# Altium PCB Bewaesserung_Rev_B.PcbDoc
Units mm, origin at the board's own origin, x right, y up, seen from the top; angles counter-clockwise.
Board outline 238.7 x 148.7 mm, 2 copper layers (Top Layer, Bottom Layer); 91 components, 70 nets, 343 pads, 4 vias.
Unrouted connection lines stored in the file: 194.
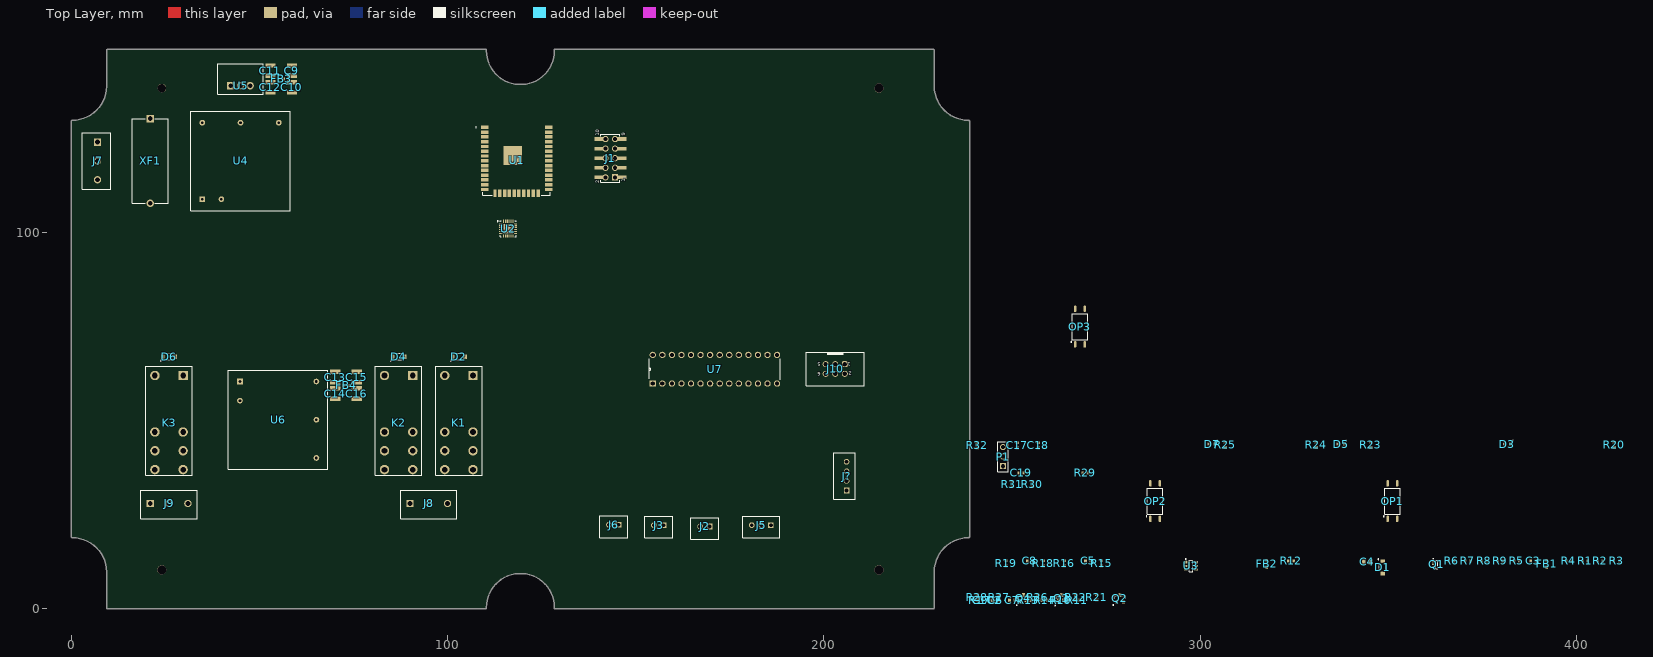
[diagram p0: Top Layer view]
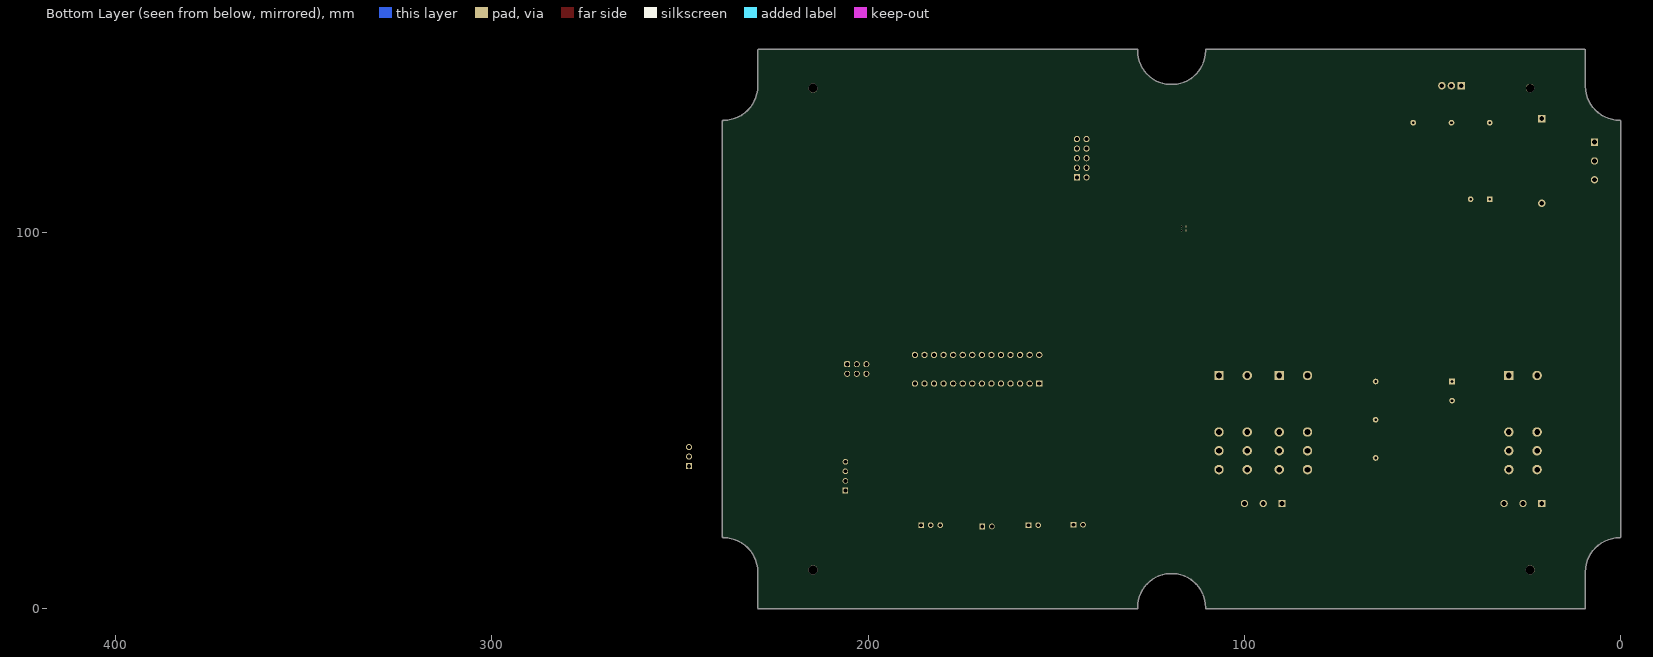
[diagram p1: Bottom Layer view, seen from below]

## Layer stack, top to bottom
Top Solder: solder mask 0.0102, Solder Resist, Dk 3.5
Top Layer: signal copper 0.0356
Dielectric 1: dielectric 0.32, FR-4, Dk 4.8
Bottom Layer: signal copper 0.0356
Bottom Solder: solder mask 0.0102, Solder Resist, Dk 3.5

## Board outline
0.35,18.9 1.363,18.843 2.364,18.673 3.339,18.392 4.277,18.004 5.165,17.513 5.993,16.926 6.749,16.249 7.426,15.493 8.013,14.665 8.504,13.777 8.892,12.839 9.173,11.864 9.343,10.863 9.4,9.85 9.4,0.35 9.409,0.272 9.435,0.198 9.476,0.132 9.532,0.076 9.598,0.035 9.672,0.009 9.75,0 110.3,0 110.3,0.35 110.353,1.328 110.512,2.295 110.774,3.24 111.136,4.15 111.595,5.016 112.145,5.827 112.78,6.574 113.491,7.248 114.271,7.841 115.111,8.346 116,8.757 116.929,9.07 117.886,9.281 118.86,9.387 119.84,9.387 120.814,9.281 121.771,9.07 122.7,8.757 123.589,8.346 124.429,7.841 125.209,7.248 125.92,6.574 126.555,5.827 127.105,5.016 127.564,4.15 127.926,3.24 128.188,2.295 128.347,1.328 128.4,0.35 128.4,0 228.95,0 229.028,0.009 229.102,0.035 229.168,0.076 229.224,0.132 229.265,0.198 229.291,0.272 229.3,0.35 229.3,9.85 229.357,10.863 229.527,11.864 229.808,12.839 230.196,13.777 230.687,14.665 231.274,15.493 231.951,16.249 232.707,16.926 233.535,17.513 234.423,18.004 235.361,18.392 236.336,18.673 237.337,18.843 238.35,18.9 238.428,18.909 238.502,18.935 238.568,18.976 238.624,19.032 238.665,19.098 238.691,19.172 238.7,19.25 238.7,129.45 238.691,129.528 238.665,129.602 238.624,129.668 238.568,129.724 238.502,129.765 238.428,129.791 238.35,129.8 237.337,129.857 236.336,130.027 235.361,130.308 234.423,130.696 233.535,131.187 232.707,131.774 231.951,132.451 231.274,133.207 230.687,134.035 230.196,134.923 229.808,135.861 229.527,136.836 229.357,137.837 229.3,138.85 229.3,148.35 229.291,148.428 229.265,148.502 229.224,148.568 229.168,148.624 229.102,148.665 229.028,148.691 228.95,148.7 128.4,148.7 128.4,148.35 128.347,147.372 128.188,146.405 127.926,145.46 127.564,144.55 127.105,143.684 126.555,142.873 125.92,142.126 125.209,141.452 124.429,140.859 123.589,140.354 122.7,139.943 121.771,139.63 120.814,139.419 119.84,139.313 118.86,139.313 117.886,139.419 116.929,139.63 116,139.943 115.111,140.354 114.271,140.859 113.491,141.452 112.78,142.126 112.145,142.873 111.595,143.684 111.136,144.55 110.774,145.46 110.512,146.405 110.353,147.372 110.3,148.35 110.3,148.7 9.75,148.7 9.672,148.691 9.598,148.665 9.532,148.624 9.476,148.568 9.435,148.502 9.409,148.428 9.4,148.35 9.4,138.85 9.343,137.837 9.173,136.836 8.892,135.861 8.504,134.923 8.013,134.035 7.426,133.207 6.749,132.451 5.993,131.774 5.165,131.187 4.277,130.696 3.339,130.308 2.364,130.027 1.363,129.857 0.35,129.8 0.272,129.791 0.198,129.765 0.132,129.724 0.076,129.668 0.035,129.602 0.009,129.528 0,129.45 0,19.25 0.009,19.172 0.035,19.098 0.076,19.032 0.132,18.976 0.198,18.935 0.272,18.909

## Design rules (kind name [scope] priority, off if disabled: settings)
Clearance [All] p1: gap=0.254 ignorepadtopadclearanceinfootprint=FALSE except(0: Arc-Hole Track-Hole SMDPad-Hole THPad-Hole Via-Hole Fill-Hole Poly-Hole Region-Hole Text-Hole)
DiffPairsRouting [All] p1: maxlimit=0.254 minlimit=0.254 mostfreqgap=0.254 toplayer_minwidth=0.381 toplayer_maxwidth=0.381 toplayer_prefwidth=0.381 bottomlayer_minwidth=0.381 bottomlayer_maxwidth=0.381 bottomlayer_prefwidth=0.381 maxuncoupledlength=12.7
PolygonConnect [All] p1: connectstyle=Relief reliefconductorwidth=0.254 reliefentries=4 polygonreliefangle="90 Angle" airgapwidth=0.254
RoutingVias [All] p1: holewidth=0.711 width=1.27 viastyle="Through Hole" minholewidth=0.711 minwidth=1.27 maxholewidth=0.711 maxwidth=1.27
SolderMaskExpansion [All] p1: expansion=0.102 istentingtop=FALSE
Width [All] p1: maxlimit=0.254 minlimit=0.254 preferedwidth=0.254
29 further rules are at their usual default settings.

## Classes and differential pairs
net class PWR: +12V0D GND NetU4_5 PGND VCC
net class HV: L L_F N PE PUMPE_L PUMPE_N VALVE_CLOSE VALVE_L VALVE_N VALVE_OPEN
component class 03_Flow: C17 C18 C19 J10 P1 R32 U7
differential pair class USB_D: USB_D USB_D_ESD
component class 02_Power: C9 C10 C11 C12 C13 C14 C15 C16 D2 D3 D4 D5 D6 D7 FB3 FB4 J7 J8 J9 K1 K2 K3 OP1 OP2 OP3 Q2 Q3 Q4 R20 R21 R22 R23 R24 R25 R26 R27 R28 R29 R30 R31 U4 U5 U6 XF1
component class 01_MCU: C1 C2 C3 C4 C5 C6 C7 C8 D1 FB1 FB2 J1 J2 J3 J5 J6 J? Q1 R1 R2 R3 R4 R5 R6 R7 R8 R9 R10 R11 R12 R13 R14 R15 R16 R17 R18 R19 U1 U2 U3
differential pair USB_D: +USB_D_P -USB_D_N
differential pair USB_D_ESD: +USB_D_ESD_P -USB_D_ESD_N

## Components (designator, comment, footprint, x,y, rotation, side; value= is the part's Value field where it differs from the comment)
C1 "CL10B103KA8NNNC" C_0603_B 241.337,2.325 r0 top value=10nF
C2 "CL10B104KA8NNNC" C_0603_B 245.312,2.325 r0 top value=100nF
C3 "CL10B104KA8NNNC" C_0603_B 388.469,12.726 r0 top value=100nF
C4 "CL21A226MQQNNNE" C_0805_B 344.267,12.501 r0 top value=22uF
C5 "CL10B105KO8NNNC" C_0603_B 270.188,12.726 r0 top value=1uF
C6 "CL10B104KA8NNNC" C_0603_B 245.662,2.325 r0 top value=100nF
C7 "CL10B104KA8NNNC" C_0603_B 249.987,2.325 r0 top value=100nF
C8 "CL10B104JA8NNNC" C_0603_B 254.713,12.726 r0 top value=100nF
C9 "CL32B226KAJNNNE" C_1210_B 58.65,142.975 r270 top value=22uF
C10 "CL32B106KAJNNNE" C_1210_B 58.65,138.575 r90 top value=10uF
C11 "CL32B226KAJNNNE" C_1210_B 52.95,142.975 r270 top value=22uF
C12 "CL32B106KAJNNNE" C_1210_B 52.95,138.575 r90 top value=10uF
C13 "CL32B226KAJNNNE" C_1210_B 70.175,61.6 r270 top value=22uF
C14 "CL32B106KAJNNNE" C_1210_B 70.175,57.2 r90 top value=10uF
C15 "CL32B226KAJNNNE" C_1210_B 75.875,61.6 r270 top value=22uF
C16 "CL32B106KAJNNNE" C_1210_B 75.875,57.2 r90 top value=10uF
C17 "CL10B103KA8NNNC" C_0603_B 251.337,43.452 r90 top value=10nF
C18 "CL10B104KA8NNNC" C_0603_B 256.913,43.452 r90 top value=100nF
C19 "CL10B104KA8NNNC" C_0603_B 252.412,36.102 r0 top value=100nF
D1 "SS1040_R1_00001" SS1040_R1_00001 348.392,11.051 r90 top
D2 "SS1040_R1_00001" SS1040_R1_00001 103,67 r180 top
D3 "SML-D12P8WT86" "0603 LED" 381.569,43.802 r0 top
D4 "SS1040_R1_00001" SS1040_R1_00001 87,67 r180 top
D5 "SML-D12P8WT86" "0603 LED" 337.392,43.802 r0 top
D6 "SS1040_R1_00001" SS1040_R1_00001 26,67 r180 top
D7 "SML-D12P8WT86" "0603 LED" 303.09,43.802 r0 top
FB1 "742792641" "WE-CBF_0603_High Current" 391.969,11.926 r90 top
FB2 "742792641" "WE-CBF_0603_High Current" 317.616,11.926 r90 top
FB3 "MPZ1608S601ATD25" MPZ1608S601ATD25 55.8,140.775 r0 top
FB4 "MPZ1608S601ATD25" MPZ1608S601ATD25 73.025,59.4 r0 top
J1 "61001621121" 61001621121 143.235,119.725 r90 top
J2 "B2B-XH-A" JST_XH_2.54_2pin_vert 168.355,21.9 r180 top
J3 "B2B-XH-A" JST_XH_2.54_2pin_vert 156.075,22.25 r180 top
J5 "B3B-XH-A" JST_XH_2.54_3pin_vert 183.35,22.25 r180 top
J6 "B2B-XH-A" JST_XH_2.54_2pin_vert 144.145,22.35 r180 top
J7 "691137710003" 691137710003 7,119 r270 top
J8 "691137710003" 691137710003 95,28 r0 top
J9 "691137710003" 691137710003 26,28 r0 top
J10 "61200621621" 61200621621 202.985,63.73 r180 top
J? "B4B-XH-A" JST_XH_2.54_4pin_vert 206,35.27 r90 top
K1 "40.52.9.012.0000" 40.52.9.012.0000 103,50 r270 top
K2 "40.52.9.012.0000" 40.52.9.012.0000 87,50 r270 top
K3 "40.52.9.012.0000" 40.52.9.012.0000 26,50 r270 top
OP1 "TCLD1000" TCLD1000 351.017,28.627 r90 top
OP2 "TCLD1000" TCLD1000 287.964,28.627 r90 top
OP3 "TCLD1000" TCLD1000 268,75 r90 top
P1 "61300311121" 61300311121 247.562,40.452 r90 top
Q1 "MBT3904DW1T1G" ONSC-SOT-363-6-419B-02_W_V 362.768,11.826 r0 top
Q2 "IRLML6244TRPBF" IRLML6244TRPBF 278.639,2.8 r0 top
Q3 "IRLML6244TRPBF" IRLML6244TRPBF 263.163,2.8 r0 top
Q4 "IRLML6244TRPBF" IRLML6244TRPBF 252.987,2.8 r0 top
R1 "RC0603FR-0710KL" R_0603_B 402.245,12.726 r0 top value=10K
R2 "RC0603FR-0710KL" R_0603_B 406.22,12.726 r0 top value=10K
R3 "RC0603FR-0710KL" R_0603_B 410.545,12.726 r0 top value=10K
R4 "RC0603FR-0710KL" R_0603_B 397.92,12.726 r0 top value=10K
R5 "RC0603FR-0710KL" R_0603_B 383.994,12.726 r0 top value=10K
R6 "RC0603FR-072K2L" R_0603_B 366.718,12.726 r0 top value=2K2
R7 "RC0603FR-0710KL" R_0603_B 371.043,12.726 r0 top value=10K
R8 "RC0603FR-072K2L" R_0603_B 375.368,12.726 r0 top value=2K2
R9 "RC0603FR-0710KL" R_0603_B 379.669,12.726 r0 top value=10K
R10 "RC0603FR-071KL" R_0603_B 262.938,2.325 r0 top value=1K
R11 "RC0603FR-071KL" R_0603_B 267.238,2.325 r0 top value=1K
R12 "RC0603FR-0710KL" R_0603_B 324.091,12.726 r0 top value=10K
R13 "RC0603FR-071KL" R_0603_B 254.288,2.325 r0 top value=1K
R14 "RC0603FR-0710KL" R_0603_B 258.613,2.325 r0 top value=10K
R15 "RC0603FR-0722KL" R_0603_B 273.738,12.101 r90 top value=22K
R16 "RC0603FR-0722KL" R_0603_B 263.838,12.101 r90 top value=22K
R17 "RC0603FR-0718KL" R_0603_B 241.337,2.325 r0 top value=18K
R18 "RC0603FR-0747KL" R_0603_B 258.263,12.101 r90 top value=47K
R19 "RC0603FR-0747KL" R_0603_B 248.362,12.101 r90 top value=47K
R20 "RC0603FR-074K7L" R_0603_B 409.97,43.577 r90 top value=4K7
R21 "RC0603FR-072K26L" R_0603_B 272.488,3.075 r90 top value=2K26
R22 "RC0603FR-0710KL" R_0603_B 266.888,3.075 r90 top value=10K
R23 "RC0603FR-07360RL" R_0603_B 345.242,43.577 r90 top value=360R
R24 "RC0603FR-074K7L" R_0603_B 330.741,43.577 r90 top value=4K7
R25 "RC0603FR-072K26L" R_0603_B 306.64,43.577 r90 top value=2K26
R26 "RC0603FR-0710KL" R_0603_B 256.738,3.075 r90 top value=10K
R27 "RC0603FR-07360RL" R_0603_B 246.562,3.075 r90 top value=360R
R28 "RC0603FR-074K7L" R_0603_B 240.737,3.075 r90 top value=4K7
R29 "RC0603FR-072K26L" R_0603_B 269.438,36.102 r0 top value=2K26
R30 "RC0603FR-0710KL" R_0603_B 255.288,33.177 r90 top value=10K
R31 "RC0603FR-07360RL" R_0603_B 249.962,33.177 r90 top value=360R
R32 "RC0603FR-071KL" R_0603_B 240.737,43.452 r90 top value=1K
U1 "ESP32-WROOM-32D-N16" MODULE_ESP32-WROOM-32D 118.325,120.425 r0 top
U2 "CP2102N-A02-GQFN24R" SLAB-QFN-24-2550x2550TP_A_V 116.1,101.025 r0 top
U3 "82400102" SOT95P280X145-6N 297.49,11.426 r0 top
U4 "TMPS 03-112" "TMPS 03" 45,119 r180 top
U5 "TSR 0.5-2433" "TSR 0.5-2433-Footprint-1" 45,139 r180 top
U6 "TMPS 03-112" "TMPS 03" 55,50.25 r90 top
U7 "ATMEGA8A-PU" DIP254P762X457-28 171.025,63.665 r90 top
XF1 "696103201002" 696103201002 21,119 r270 top

## Footprints (in the part's own frame and the unit in brackets; to place one, negate y for a bottom-side part, rotate by r counter-clockwise, add the part's x,y. Pads: shape width x height; smd on the part's side, far side on the other; paste and mask are expansions set on the pad)
40.52.9.012.0000 [mm] "40.52.9.012.0000 relay"
  round 2.5 hole 1.5: 11(8,3.75) 12(3,3.75) 14(13,3.75) 21(8,-3.75) 22(3,-3.75) 24(13,-3.75) A2(-12,-3.75)
  rect 2.5x2.5 hole 1.5: A1(-12,3.75)
  silkscreen extent -14.5,-6.2 14.5,6.2, body extent -15.01,-6.22 13.99,6.18, height 25
"0603 LED" [mm] "0603 LED"
  rect 0.8x0.8 smd: A(-0.825,0) K(0.825,0)
  silkscreen extent 1.28,0.78 1.53,1.02, body extent -0.8,-0.4 0.8,0.4, height 0.55
61001621121 [mm] "Pin Header, pitch 2.54 mm, SMD, Vertical, dual row, 16p"
  rect 1x3.1 smd: 1(-5.08,-2.7) 2(-5.08,2.7) 3(-2.54,-2.7) 4(-2.54,2.7) 5(0,-2.7) 6(0,2.7) 7(2.54,-2.7) 8(2.54,2.7) 9(5.08,-2.7) 10(5.08,2.7)
  rect 1.65x1.65 hole 1.1: 1(-5.08,-1.265)
  round 1.65 hole 1.1: 2(-5.08,1.275) 3(-2.54,-1.265) 4(-2.54,1.275) 5(0,-1.265) 6(0,1.275) 7(2.54,-1.265) 8(2.54,1.275) 9(5.08,-1.265) 10(5.08,1.275)
  silkscreen extent -6.43,-2.56 6.43,2.57, body extent -6.35,-3.75 6.35,3.75, height 9.57
61200621621 [mm] "6 pins, straight, gold plating"
  rrect50% 1.6x1.6 hole 1.1: 1(-2.54,-1.27)
  round 1.6 hole 1.1: 2(-2.54,1.27) 3(0,-1.27) 4(0,1.27) 5(2.54,-1.27) 6(2.54,1.27)
  silkscreen extent -7.74,-4.5 7.74,4.5, body extent -7.64,-4.43 7.64,4.75, height 9.13
61300311121 [mm] "Pin Header, pitch 2.54 mm, THT, Vertical, single row, 3p"
  rect 1.6x1.6 hole 1.1: 1(-2.54,0)
  round 1.6 hole 1.1: 2(0,0) 3(2.54,0)
  silkscreen extent -3.96,-1.35 3.96,1.35, body extent -3.81,-1.27 3.81,1.27, height 8.57
691137710003 [mm] "Horizontal Cable Entry with Pressure Clamp, pitch 5mm, 03p"
  rect 1.95x1.95 hole 1.3: 1(-5,0)
  round 1.95 hole 1.3: 2(0,0) 3(5,0)
  silkscreen extent -7.5,-4 7.5,3.5, body extent -7.5,-4 7.5,3.5, height 11.6
696103201002 [mm] "FUSEHOLDER BLOCKS - PCB - CLIP COVER - THR"
  rect 1.95x1.95 hole 1.3: 1(-11.25,0)
  round 1.95 hole 1.3: 2(11.25,0)
  silkscreen extent -11.2,-4.8 11.2,4.8, body extent -12.05,-4.8 12.05,4.8, height 11.55
C_0603_B [mm]
  rect 0.7x0.9 smd: 1(-0.7,0) 2(0.7,0)
  body extent -0.8,-0.4 0.8,0.4, height 0.9
C_0805_B [mm]
  rect 1x1.35 smd: 1(-0.9,0) 2(0.9,0)
  body extent -1,-0.62 1,0.63, height 1.45
C_1210_B [mm]
  rect 1.15x2.7 smd: 1(-1.375,0) 2(1.375,0)
  body extent -1.6,-1.25 1.6,1.25, height 2.8
DIP254P762X457-28 [mil]
  rect 66x66 hole 44: 1(-150,650)
  round 66 hole 44: 2(-150,550) 3(-150,450) 4(-150,350) 5(-150,250) 6(-150,150) 7(-150,50) 8(-150,-50) 9(-150,-150) 10(-150,-250) 11(-150,-350) 12(-150,-450) 13(-150,-550) 14(-150,-650) 15(150,-650) 16(150,-550) 17(150,-450) 18(150,-350) 19(150,-250) 20(150,-150) 21(150,-50) 22(150,50) 23(150,150) 24(150,250) 25(150,350) 26(150,450) 27(150,550) 28(150,650)
  silkscreen extent -112,-685 112,685, body extent -200,-684 200,681, height 180
IRLML6244TRPBF [mm] "N-MOSFET Vds 20V Uth 1.0V RDSon 27mO"
  rect 0.802x0.972 smd: 1(-0.95,-0.885) 2(0.95,-0.885) 3(0,0.885)
  silkscreen extent -1.9,-1.9 1.52,0.7, body extent -1.52,-1.32 1.52,1.32, height 1.12
JST_XH_2.54_2pin_vert [mm] "JST XH-A-series straight THT 2-pol."
  rect 1.5x1.5 hole 1: 1(-1.27,0)
  round 1.5 hole 1: 2(1.27,0)
  silkscreen extent -3.7,-2.35 3.7,3.4, body extent -3.61,-2.49 3.61,3.35, height 7.21
JST_XH_2.54_3pin_vert [mm] "JST XH-A-series straight THT 3-pol."
  rect 1.5x1.5 hole 1: 1(-2.54,0)
  round 1.5 hole 1: 2(0,0) 3(2.54,0)
  silkscreen extent -4.95,-2.35 4.95,3.4, body extent -4.88,-2.49 4.88,3.35, height 7.21
JST_XH_2.54_4pin_vert [mm] "JST connector, XH-series, vertival, 4pos."
  rect 1.5x1.5 hole 1: 1(-3.81,0)
  round 1.5 hole 1: 2(-1.27,0) 3(1.27,0) 4(3.81,0)
  silkscreen extent -6.2,-2.35 6.2,3.4, body extent -6.15,-2.49 6.15,3.35, height 7.21
MODULE_ESP32-WROOM-32D [mm]
  rect 2x0.9 smd: 1(-8.5,7.5) 2(-8.5,6.23) 3(-8.5,4.96) 4(-8.5,3.69) 5(-8.5,2.42) 6(-8.5,1.15) 7(-8.5,-0.12) 8(-8.5,-1.39) 9(-8.5,-2.66) 10(-8.5,-3.93) 11(-8.5,-5.2) 12(-8.5,-6.47) 13(-8.5,-7.74) 14(-8.5,-9.01) 25(8.5,-9.01) 26(8.5,-7.74) 27(8.5,-6.47) 28(8.5,-5.2) 29(8.5,-3.93) 30(8.5,-2.66) 31(8.5,-1.39) 32(8.5,-0.12) 33(8.5,1.15) 34(8.5,2.42) 35(8.5,3.69) 36(8.5,4.96) 37(8.5,6.23) 38(8.5,7.5)
  rect 0.9x2 smd: 15(-5.715,-10.01) 16(-4.445,-10.01) 17(-3.175,-10.01) 18(-1.905,-10.01) 19(-0.635,-10.01) 20(0.635,-10.01) 21(1.905,-10.01) 22(3.175,-10.01) 23(4.445,-10.01) 24(5.715,-10.01)
  rect 5x5 smd: 39(-1,0)
  silkscreen extent -10.9,-10.51 9,7.6, body extent -9,-10.51 9,14.99, height 3.26
MPZ1608S601ATD25 [mm] "SMD Ferrit Bead 600O@100MHz 1A DCR 150mO"
  rect 0.6x0.8 smd: 1(-0.7,0) 2(0.7,0)
  body extent -0.87,-0.48 0.87,0.48, height 0.95
ONSC-SOT-363-6-419B-02_W_V [mm]
  rect 0.5x0.4 smd: 1(-0.95,0.65) 2(-0.95,0) 3(-0.95,-0.65) 4(0.95,-0.65) 5(0.95,0) 6(0.95,0.65)
  silkscreen extent -1.07,-1.1 0.3,1.52, body extent -0.63,-1 0.63,1, height 1.1
R_0603_B [mm]
  rect 0.7x0.9 smd: 1(-0.7,0) 2(0.7,0)
  body extent -0.85,-0.45 0.85,0.45, height 0.55
SLAB-QFN-24-2550x2550TP_A_V [mm]
  rect 0.85x0.3 smd: 1(-1.95,1.25) 2(-1.95,0.75) 3(-1.95,0.25) 4(-1.95,-0.25) 5(-1.95,-0.75) 6(-1.95,-1.25) 13(1.95,-1.25) 14(1.95,-0.75) 15(1.95,-0.25) 16(1.95,0.25) 17(1.95,0.75) 18(1.95,1.25)
  rect 0.3x0.85 smd: 7(-1.25,-1.95) 8(-0.75,-1.95) 9(-0.25,-1.95) 10(0.25,-1.95) 11(0.75,-1.95) 12(1.25,-1.95) 19(1.25,1.95) 20(0.75,1.95) 21(0.25,1.95) 22(-0.25,1.95) 23(-0.75,1.95) 24(-1.25,1.95)
  rect 2.55x2.55 smd paste-0.3: 25(0,0)
  silkscreen extent -2.92,-2.15 2.15,2.15, body extent -2,-2 2,2, height 0.8
SOT95P280X145-6N [mm]
  rect 1x0.6 smd: 1(-1.375,0.95) 2(-1.375,0) 3(-1.375,-0.95) 4(1.375,-0.95) 5(1.375,0) 6(1.375,0.95)
  silkscreen extent -1.5,-1.55 0.5,1.92, body extent -1.6,-1.53 1.6,1.53, height 1.45
SS1040_R1_00001 [mm] "SOD-123"
  rect 0.97x1.22 smd: A(-1.64,0) K(1.64,0)
  silkscreen extent -0.8,-0.85 2.27,1.22, body extent -1.9,-0.85 1.95,0.85, height 1.45
TCLD1000 [mm] "SOP, 4-Leads, Body 3,95x7,50mm, Pitch 2,54mm, IPC Medium Density"
  oval 1.75x0.65 smd: 1(-4.725,1.27) 2(-4.725,-1.27) 3(4.725,-1.27) 4(4.725,1.27)
  silkscreen extent -4.19,-2.05 3.45,2.41, body extent -5.1,-2.05 5.1,2.05, height 2.3
"TMPS 03" [mm]
  rect 1.5x1.5 hole 0.7: 1(10.16,10.16)
  round 1.5 hole 0.7: 2(5.08,10.16) 3(-10.16,-10.16) 4(0,-10.16) 5(10.16,-10.16)
  silkscreen extent -13.2,-13.2 13.2,13.2, body extent -12.85,-12.85 12.85,12.85, height 16.6
"TSR 0.5-2433-Footprint-1" [mm]
  rect 2x2 hole 1.2: 1(2.54,0)
  round 2 hole 1.2: 2(0,0) 3(-2.54,0)
  silkscreen extent -6,-5.8 6,2.25, body extent -5.71,-5.43 5.79,2.12, height 10.22
"WE-CBF_0603_High Current" [mm] "SMD EMI Suppression Ferrite  Bead, body 1.6x0.8mm"
  rect 0.95x0.7 smd: 1(-0.825,0) 2(0.825,0)
  body extent -0.8,-0.4 0.8,0.4, height 0.8

## Part data
C1 C17: library part CMP-001-00194-31, "CAP 10nF 25V 0603 ±10% X7R", Dielectric=X7R, Manufacturer=Samsung, Maximum Operating Temperature=125, Minimum Operating Temperature=-55, Package=0603, Tolerance=±10%, Voltage=25V, Creator="MSt 10-08-21", Distributor=Digikey, Distributor Ordering Code=1276-1132-1-ND, Manufacturer Part Number=CL10B103KA8NNNC, Mounting Type=SMT, Packaging="Cut Tape", Pad Count=2, RoHS=Yes
C2 C3 C6 C7 C18 C19: library part CMP-001-00198-28, "CAP 100nF 25V 0603 ±10% X7R", Dielectric=X7R, Manufacturer=Samsung, Maximum Operating Temperature=125, Minimum Operating Temperature=-55, Package=0603, Tolerance=±10%, Voltage=25V, Creator="Mst 10-08-21", Distributor=Digikey, Distributor Ordering Code=1276-1006-1-ND, Manufacturer Part Number=CL10B104KA8NNNC, Mounting Type=SMD, Packaging="cut tape", Pad Count=2, Placed=Yes, Revision Status=new, RoHS=yes
C4: library part CMP-001-00489-27, "CAP 22uF 6.3V 0805 ±20% X5R", Dielectric=X5R, Manufacturer=Samsung, Maximum Operating Temperature=85, Minimum Operating Temperature=-55, Package=0805, Tolerance=±20%, Voltage=6.3V, Creator="Mst 10-08-21", Distributor=Digikey, Distributor Ordering Code=1276-1100-1-ND, Manufacturer Part Number=CL21A226MQQNNNE, Mounting Type=SMD, Packaging="cut tape", Pad Count=2, Placed=Yes, Revision Status=new, RoHS=yes
C5: library part CMP-001-00192-28, "CAP 1uF 16V 0603 ±10% X7R", Dielectric=X7R, Manufacturer=Samsung, Maximum Operating Temperature=125, Minimum Operating Temperature=-55, Package=0603, Tolerance=±10%, Voltage=16V, Creator="Mst 10-08-21", Distributor=Digikey, Distributor Ordering Code=1276-1019-1-ND, Manufacturer Part Number=CL10B105KO8NNNC, Mounting Type=SMD, Packaging="cut tape", Pad Count=2, Placed=Yes, Revision Status=new, RoHS=yes
C8: library part CMP-001-00197-28, "CAP 100nF 25V 0603 ±5% X7R", Dielectric=X7R, Manufacturer=Samsung, Maximum Operating Temperature=125, Minimum Operating Temperature=-55, Package=0603, Tolerance=±5%, Voltage=25V, Creator="Mst 10-08-21", Distributor=Digikey, Distributor Ordering Code=1276-1929-1-ND, Manufacturer Part Number=CL10B104JA8NNNC, Mounting Type=SMD, Packaging="cut tape", Pad Count=2, Placed=Yes, Revision Status=new, RoHS=yes
C9 C11 C13 C15: library part CMP-002-001930-51, "CAP 22uF 25V 1210 ±10% X7R", Dielectric=X7R, Manufacturer=Samsung, Maximum Operating Temperature=125, Minimum Operating Temperature=-55, Package=1210, Tolerance=±10%, Voltage=25V, Creator="MSt 31-08-21", Distributor=Digikey, Distributor Ordering Code=1276-3392-1-ND, Manufacturer Part Number=CL32B226KAJNNNE, Mounting Type=SMT, Packaging="cut tape", Pad Count=2, RoHS=Yes
C10 C12 C14 C16: library part CMP-002-001929-51, "CAP 10uF 25V 1210 ±10% X7R", Dielectric=X7R, Manufacturer=Samsung, Maximum Operating Temperature=125, Minimum Operating Temperature=-55, Package=1210, Tolerance=±10%, Voltage=25V, Creator="MSt 31-08-21", Distributor=Digikey, Distributor Ordering Code=1276-1807-1-ND, Manufacturer Part Number=CL32B106KAJNNNE, Mounting Type=SMT, Packaging="cut tape", Pad Count=2, RoHS=Yes
D1 D2 D4 D6: library part CMP-004-00002-7, "Schottky Diode, 0.55V UF@IF=1A, 1A IF_max, SOD-123", Manufacturer="Panjit International", Maximum Operating Temperature=125, Minimum Operating Temperature=-55, Creator="MSt 06-02-22", Design Item ID=SS1040_R1_00001, Distributor=Digikey, Distributor Ordering Code=3757-SS1040_R1_00001CT-ND, IF=1A, Manufacturer Part Number=SS1040_R1_00001, Mounting Type=SMT, Packaging="Cut Tape", Pad Count=2, RoHS=yes, UF=0.55V
D3 D5 D7: library part CMP-004-00001-11, "green LED 0603", Manufacturer="Rohm Semiconductor", Maximum Operating Temperature=85, Minimum Operating Temperature=-40, Creator="MSt 31-01-22", Distributor=Digikey, Distributor Ordering Code=511-1579-1-ND, Manufacturer Part Number=SML-D12P8WT86, Mounting Type=SMT, Packaging="Cut Tape", Pad Count=2, RoHS=Yes
FB1 FB2: library part CMP-002-000813-11, "WE-CBF SMT EMI Suppression Ferrite Bead 0603 300Ohm@100MHz 2A", Manufacturer="Wuerth Elektronik", Maximum Operating Temperature=125, Minimum Operating Temperature=-55, Creator="MSt 08-12-21", DCR_max=150mΩ, Distributor=Digikey, Distributor Ordering Code=732-1592-1-ND, I_max=2.0A, Manufacturer Part Number=742792641, Mounting Type=SMT, Packaging="Cut Tape", Pad Count=2, RoHS=Yes, Z@100MHz=300Ω
FB3 FB4: library part CMP-00011-4, "SMD Ferrit Bead 600Ω@100MHz 1A DCR 150mΩ", Manufacturer=TDK, Maximum Operating Temperature=125, Minimum Operating Temperature=-55, Creator="MSt 03-08-23", Design Item ID=MPZ1608S601ATD25, Distributor=Digikey, Distributor Ordering Code=445-MPZ1608S601ATD25CT-ND, Manufacturer Part Number=MPZ1608S601ATD25, Mounting Type=SMT, Packaging="Cut Tape", Pad Count=2, RoHS=Yes, Z@100MHz=600Ω
J1: library part CMP-002-00004-2, "WR-PHD Pin Header, SMT, pitch 2.54mm, Dual Row, Vertical, 16p", Manufacturer="Wuerth Elektronik", Manufacturer Part Number=61001021121, Maximum Operating Temperature=105, Minimum Operating Temperature=-40, ComponentLink1Description=Datasheet, ComponentLink1URL=https://www.we-online.com/catalog/datasheet/61001621121.pdf, Creator="MSt 06-02-22", Design Item ID=61001621121, Distributor=Digikey, Distributor Ordering Code=732-5463-5-ND, Mounting Type=SMT, Packaging=Tube, Pad Count=10, RoHS=Yes, Source=10-pol.SchLib
J2 J3 J6: library part CMP-002-000810-10, "JST XH-A-series straight THT 2-pol.", Manufacturer=JST, Manufacturer Part Number=B2B-XH-A(LF)(SN), Maximum Operating Temperature=85, Minimum Operating Temperature=-25, Creator="MSt 29-11-21", Design Item ID=B2B-XH-A, Distributor=Digikey, Distributor Ordering Code=455-2247-ND, Mounting Type=THT, Packaging=Bag, Pad Count=2, RoHS=Yes
J5: library part CMP-002-000811-10, "JST XH-A-series straight THT 3-pol.", Manufacturer=JST, Manufacturer Part Number=B3B-XH-A(LF)(SN), Maximum Operating Temperature=85, Minimum Operating Temperature=-25, Creator="MSt 29-11-21", Design Item ID=B3B-XH-A, Distributor=Digikey, Distributor Ordering Code=455-2248-ND, Mounting Type=THT, Packaging=Bag, Pad Count=3, RoHS=Yes
J7 J8 J9: library part CMP-003-000003-7, "WR-TBL Serie 1377 Horizontal Entry, Pressure Clamp, THT, pitch 5mm, 3p", Manufacturer="Wuerth Elektronik", Maximum Operating Temperature=110, Minimum Operating Temperature=-30, Creator="MSt 08-12-21", Distributor=Digikey, Distributor Ordering Code=732-10956-ND, Manufacturer Part Number=691137710003, Mounting Type=THT, Packaging=Bag, Pad Count=3, RoHS=Yes
J10: library part CMP-002-000817-8, "2x3-pos. Boxed Header Male 2.54mm RM THT Straight", Manufacturer="Wuerth Elektronik", Maximum Operating Temperature=105, Minimum Operating Temperature=-40, Creator="MSt 13-02-22", Design Item ID=61200621621, Distributor=Digikey, Distributor Ordering Code=732-5394-ND, Manufacturer Part Number=61200621621, Mounting Type=THT, Packaging=Tray, Pad Count=6, RoHS=Yes
J?: library part CMP-002-000812-18, "JST XH-A-series straight THT 4-pol.", Manufacturer=JST, Manufacturer Part Number=B4B-XH-A(LF)(SN), Maximum Operating Temperature=85, Minimum Operating Temperature=-25, Creator="MSt 19-05-23", Design Item ID=B4B-XH-A, Distributor=Digikey, Distributor Ordering Code=455-2249-ND, Mounting Type=THT, Packaging=Bag, Pad Count=4, RoHS=Yes
K1 K2 K3: library part CMP-002-000814-7, "Relay Double Pole, 12V Coil Voltage, 8.0 A Continous Switched Current", coil_current=55mA, coil_resistance=220Ohm, coil_voltage_max=18.0V, coil_voltage_min=8.8V, Manufacturer="Finder Relays", Maximum Operating Temperature=85, Minimum Operating Temperature=-40, Creator="MSt 08-12-21", Distributor=Digikey, Distributor Ordering Code=2066-40.52.9.012.0000-ND, Manufacturer Part Number=40.52.9.012.0000, Mounting Type=THT, Packaging=Bag, Pad Count=8, RoHS=Yes
OP1 OP2 OP3: library part CMP-006-000012-4, "Optocoupler, Photodarlington Output", Manufacturer=Vishay, Maximum Operating Temperature=100, Minimum Operating Temperature=-55, Creator="MSt 23-08-22", Design Item ID=TCLD1000, Distributor=Digikey, Distributor Ordering Code=TCLD1000CT-ND, Manufacturer Part Number=TCLD1000, Mounting Type=SMT, Packaging="Cut Tape", Pad Count=4, RoHS=Yes
P1: library part CMP-002-00006-4, "1x3-pos. WR-PHD Pin Header 2.54mm RM THTVertical", Manufacturer="Wurth Elektronik", Maximum Operating Temperature=105, Minimum Operating Temperature=-40, Creator="MSt 18-04-22", Design Item ID=61300311121, Distributor=Digikey, Distributor Ordering Code=732-5316-ND, Manufacturer Part Number=61300311121, Mounting Type=THT, Packaging=Bag, Pad Count=3, RoHS=Yes
Q1: library part CMP-013-00000-3, "Dual General Purpose NPN Transistors", Manufacturer="Central Semiconductor Corp", Manufacturer Part Number="CMKT3920 TR PBFREE", Maximum Operating Temperature=150, Minimum Operating Temperature=-65, Creator="MSt 28-11-21", Distributor=Digikey, Distributor Ordering Code=1514-CMKT3920TRPBFREECT-ND, Mounting Type=SMD, Packaging="cut tape", Pad Count=6, Placed=yes, Revision Status=new, RoHS=yes
Q2 Q3 Q4: library part CMP-013-00002-6, "N-MOSFET Vds 20V Uth 1.1V ID 5.1A RDSon 27mΩ", Manufacturer="Infineon Technologies", Maximum Operating Temperature=150, Minimum Operating Temperature=-55, Creator="MSt 10-10-22", Design Item ID=IRLML6244TRPBF, Distributor=Digikey, Distributor Ordering Code=IRLML6244TRPBFCT-ND, Manufacturer Part Number=IRLML6244TRPBF, Mounting Type=SMT, Packaging="Cut Tape", Pad Count=3, RoHS=Yes
R1 R2 R3 R4 R5 R7 R9 R12 R14 R22 R26 R30: library part CMP-002-004901-43, "RES 10K 0603 1% 0.1W", Manufacturer=Yageo, Maximum Operating Temperature=155, Maximum Voltage=150V, Minimum Operating Temperature=-55, Package=0603, power=0.1W, Tolerance=±1%, Creator="MSt 26-08-21", Distributor=Digikey, Distributor Ordering Code=311-10.0KHRCT-ND, Manufacturer Part Number=RC0603FR-0710KL, Mounting Type=SMT, Packaging="Cut Tape", Pad Count=2, RoHS=Yes
R6 R8: library part CMP-002-000321-18, "RES 2K2 0603 1% 0.1W", Manufacturer=Yageo, Maximum Operating Temperature=155, Maximum Voltage=150V, Minimum Operating Temperature=-55, Package=0603, power=0.1W, Tolerance=±1%, Creator="MSt 12-11-21", Distributor=Digikey, Distributor Ordering Code=311-2.20KHRCT-ND, Manufacturer Part Number=RC0603FR-072K2L, Mounting Type=SMT, Packaging="Cut Tape", Pad Count=2, RoHS=Yes
R10 R11 R13 R32: library part CMP-002-004805-43, "RES 1K 0603 1% 0.1W", Manufacturer=Yageo, Maximum Operating Temperature=155, Maximum Voltage=150V, Minimum Operating Temperature=-55, Package=0603, power=0.1W, Tolerance=±1%, Creator="MSt 26-08-21", Distributor=Digikey, Distributor Ordering Code=311-1.00KHRCT-ND, Manufacturer Part Number=RC0603FR-071KL, Mounting Type=SMT, Packaging="Cut Tape", Pad Count=2, RoHS=Yes
R15 R16: library part CMP-002-000339-18, "RES 22K 0603 1% 0.1W", Manufacturer=Yageo, Maximum Operating Temperature=155, Maximum Voltage=150V, Minimum Operating Temperature=-55, Package=0603, power=0.1W, Tolerance=±1%, Creator="MSt 12-11-21", Distributor=Digikey, Distributor Ordering Code=311-22.0KHRCT-ND, Manufacturer Part Number=RC0603FR-0722KL, Mounting Type=SMT, Packaging="Cut Tape", Pad Count=2, RoHS=Yes
R17: library part CMP-002-000338-18, "RES 18K 0603 1% 0.1W", Manufacturer=Yageo, Maximum Operating Temperature=155, Maximum Voltage=150V, Minimum Operating Temperature=-55, Package=0603, power=0.1W, Tolerance=±1%, Creator="MSt 12-11-21", Distributor=Digikey, Distributor Ordering Code=311-18.0KHRCT-ND, Manufacturer Part Number=RC0603FR-0718KL, Mounting Type=SMT, Packaging="Cut Tape", Pad Count=2, RoHS=Yes
R18 R19: library part CMP-002-000347-18, "RES 47K 0603 1% 0.1W", Manufacturer=Yageo, Maximum Operating Temperature=155, Maximum Voltage=150V, Minimum Operating Temperature=-55, Package=0603, power=0.1W, Tolerance=±1%, Creator="MSt 12-11-21", Distributor=Digikey, Distributor Ordering Code=311-47.0KHRCT-ND, Manufacturer Part Number=RC0603FR-0747KL, Mounting Type=SMT, Packaging="Cut Tape", Pad Count=2, RoHS=Yes
R20 R24 R28: library part CMP-002-000329-18, "RES 4K7 0603 1% 0.1W", Manufacturer=Yageo, Maximum Operating Temperature=155, Maximum Voltage=150V, Minimum Operating Temperature=-55, Package=0603, power=0.1W, Tolerance=±1%, Creator="MSt 12-11-21", Distributor=Digikey, Distributor Ordering Code=311-4.70KHRCT-ND, Manufacturer Part Number=RC0603FR-074K7L, Mounting Type=SMT, Packaging="Cut Tape", Pad Count=2, RoHS=Yes
R21 R25 R29: library part CMP-002-004839-43, "RES 2K26 0603 1% 0.1W", Manufacturer=Yageo, Maximum Operating Temperature=155, Maximum Voltage=150V, Minimum Operating Temperature=-55, Package=0603, power=0.1W, Tolerance=±1%, Creator="MSt 26-08-21", Distributor=Digikey, Distributor Ordering Code=311-2.26KHRCT-ND, Manufacturer Part Number=RC0603FR-072K26L, Mounting Type=SMT, Packaging="Cut Tape", Pad Count=2, RoHS=Yes
R23 R27 R31: library part CMP-002-000308-18, "RES 360R 0603 1% 0.1W", Manufacturer=Yageo, Maximum Operating Temperature=155, Maximum Voltage=150V, Minimum Operating Temperature=-55, Package=0603, power=0.1W, Tolerance=±1%, Creator="MSt 12-11-21", Distributor=Digikey, Distributor Ordering Code=311-360HRCT-ND, Manufacturer Part Number=RC0603FR-07360RL, Mounting Type=SMT, Packaging="Cut Tape", Pad Count=2, RoHS=Yes
U1: library part CMP-013-000000-9, "ESP32-WROOM-32D-N16 16MB Flash", Manufacturer="Espressif Systems", Maximum Operating Temperature=85, Minimum Operating Temperature=-40, Creator="MSt 05-10-21", Distributor=Digikey, Distributor Ordering Code=1965-ESP32-WROOM-32D-N16CT-ND, Manufacturer Part Number=ESP32-WROOM-32D-N16, Mounting Type=SMT, Packaging="Cut Tape", Pad Count=39, RoHS=Yes
U2: library part CMP-001-0012-2, "USB Interface IC USBXpress - USB to UART Bridge", Manufacturer="Silicon Labs", Maximum Operating Temperature=85, Minimum Operating Temperature=-40, Creator="MSt 29-11-21", Distributor=Mouser, Distributor Ordering Code=634-CP2102NA02QFN24R, Manufacturer Part Number=CP2102N-A02-GQFN24R, Mounting Type=SMD, Packaging="cut tape", Pad Count=25, Placed=yes, Revision Status=new, RoHS=yes
U3: library part CMP-001-0008-2, "82400102, USB ESD protection", Manufacturer="Wuerth Elektronik", Maximum Operating Temperature=125, Minimum Operating Temperature=-55, Creator="MSt 29-11-21", Distributor=Digikey, Distributor Ordering Code=732-4473-1-ND, Manufacturer Part Number=82400102, Mounting Type=SMD, Packaging="cut tape", Pad Count=6, Placed=yes, Revision Status=new, RoHS=yes
U4 U6: library part CMP-002-000000-10, "Traco 3W AC/DC converter 12V Output", Manufacturer="Traco Power", Maximum Operating Temperature=70, Minimum Operating Temperature=-25, Creator="MSt 05-10-21", Distributor=Digikey, Distributor Ordering Code=1951-1176-ND, Manufacturer Part Number="TMPS 03-112", Mounting Type=THT, Packaging=box, Pad Count=5, RoHS=yes
U5: library part CMP-002-000808-6, "Traco 0.5A DC/DC Converter 3.3V Output", Manufacturer=Traco, Maximum Operating Temperature=90, Minimum Operating Temperature=-40, Creator="MSt 15-11-21", Distributor=Digikey, Distributor Ordering Code=1951-2707-ND, Manufacturer Part Number="TSR 0.5-2433", Mounting Type=THT, Packaging=Bulk, Pad Count=3, RoHS=Yes
U7: library part CMP-002-000816-3, "ATMEGA8", Manufacturer="Microchip Technology", Maximum Operating Temperature=125, Minimum Operating Temperature=-55, Creator="MSt 13-02-22", Design Item ID=ATMEGA8A-PU, Distributor=Digikey, Distributor Ordering Code=ATMEGA8A-PU-ND, Manufacturer Part Number=ATMEGA8A-PU, Mounting Type=THT, Packaging=Tube, Pad Count=28, RoHS=Yes, Source=ATMEGA8A-PU.SchLib
XF1: library part CMP-003-000004-8, "WR-FSH Fuseholder THR Blocks PCB Clip Cover", Manufacturer="Wuerth Elektronik", Maximum Operating Temperature=120, Minimum Operating Temperature=-30, Trip Current=-, Creator="MSt 08-12-21", Design Item ID=696103201002, Distributor=Digikey, Distributor Ordering Code=732-11372-ND, Manufacturer Part Number=696103201002, Mounting Type=THT, Packaging=Box, Pad Count=2, RoHS=Yes

## Free pads (board coordinates)
  round 2.252 hole 2.252: 1(24.1,138.35)
  round 2.4 hole 2.4: 1(24.1,10.35) 1(214.6,10.35) 1(214.6,138.35)

## Via types
v1: diameter 0.5, hole 0.2, Top Layer to Bottom Layer, 4 vias

## Nets (pads, with @x,y where several pads share a name; then routed paths per layer and width w, separated by ;. In a path a pad name is that pad's centre, name@x,y a point inside that pad or via, vN(x,y) a via of type N, cw(c..) or ccw(c..) an arc to the next point about the centre after c; other vN are vias at no path point)
+12V0D: C15.2 C16.2 D2.K D4.K D6.K FB4.2 K1.A2 K2.A2 K3.A2 OP1.4 OP2.4 OP3.4 R20.2 R24.2 R28.2
ATM8_MISO: J10.1 U7.18
ATM8_MOSI: J10.4 U7.17
ATM8_RST: C19.2 J10.5 P1.3 R32.2
ATM8_SCLK: J10.3 U7.19
ESP32_EN: C3.2 P1.1 Q1.4 R2.1 U1.3
GND: C1.1 C2.1 C3.1 C4.1 C5.1 C6.1 C7.1 C8.1 C9.1 C10.1 C11.1 C12.1 C17.1 C18.1 C19.1 J1.2 J2.2 J3.2 J5.3 J6.2 J10.6 OP1.2 OP2.2 OP3.2 R17.1 R18.1 R19.1 R22.1 R26.1 R30.1 R32.1 U1.1 U1.15 U1.38 U1.39 U2.2 U2.25 U3.2 U4.4 U5.2 U7.8 U7.22
  other v1: 115.55,100.475 116.65,100.475 115.55,101.575 116.65,101.575
GPI36: D1.A R7.1
GPIO0: Q1.6 R1.1 U1.25
GPIO13: J1.6 R8.1
GPIO17: J1.10 R9.1
HSPICLK: J1.9 U1.13
HSPID: J1.8 U1.24
HSPIQ: J1.7 U1.23
L: J7.1 XF1.1
L_F: K1.21 K3.21 U4.2 U6.2 XF1.2
LED_HEART: R10.2 U1.16
LED_WIFI: R11.2 U1.12 U1.14
N: J7.3 K1.11 K3.11 U4.1 U6.1
NetC7_2: C7.2 R14.1 R17.2 U7.4
NetC11_2: C11.2 C12.2 FB3.1 U5.3
NetC13_2: C13.2 C14.2 FB4.1 U6.5
NetD1_K: D1.K J1.4
NetD2_A: D2.A D3.K K1.A1 Q2.3
NetD3_A: D3.A R20.1
NetD4_A: D4.A D5.K K2.A1 Q3.3
NetD5_A: D5.A R24.1
NetD6_A: D6.A D7.K K3.A1 Q4.3
NetD7_A: D7.A R28.1
NetJ1_5: J1.5 R6.1
NetJ2_1: J2.1 R10.1
NetJ3_1: J3.1 R11.1
NetJ5_2: J5.2 R14.2
NetOP1_1: OP1.1 R21.1
NetOP1_3: OP1.3 Q2.1 R23.2
NetOP2_1: OP2.1 R25.1
NetOP2_3: OP2.3 Q3.1 R27.2
NetOP3_1: OP3.1 R29.1
NetOP3_3: OP3.3 Q4.1 R31.2
NetP1_2: P1.2 U7.1
NetQ1_2: Q1.2 R5.2
NetQ1_3: Q1.3 R4.2
NetR12_1: R12.1 U2.9
NetR21_2: R21.2 R22.2 U1.27
NetR25_2: R25.2 R26.2 U1.28
NetR29_2: R29.2 R30.2 U1.8
NetU1_4: U1.4 U7.3
NetU1_26: U1.26 U7.2
NetU4_5: U4.5 U5.1
PE: J7.2 J9.1
PGND: C13.1 C14.1 C15.1 C16.1 Q2.2 Q3.2 Q4.2 R23.1 R27.1 R31.1 U6.4
PUMPE_L: J9.3 K3.24
PUMPE_N: J9.2 K3.14
UART_DTR: Q1.1 R4.1 U2.23
UART_RTS: Q1.5 R5.1 U2.19
UART_RX: U1.34 U2.21
UART_TX: U1.35 U2.20
USB_D_ESD_N: U2.4 U3.4
USB_D_ESD_P: U2.3 U3.6
USB_D_N: U3.3
USB_D_P: U3.1
USR_BUTN: C6.2 J6.1 R3.1 R13.1 U1.5
VALVE_CLOSE: J8.2 K2.22
VALVE_L: K1.24 K2.21
VALVE_N: J8.3 K1.14
VALVE_OPEN: J8.1 K2.24
VBUS: C5.2 R15.2 R16.2 U3.5
VBUS_3V3: R15.1 R16.1 R18.2 R19.2 U2.8
VCC: C1.2 C2.2 C8.2 C9.2 C10.2 C17.2 C18.2 FB3.2 J5.1 J10.2 R1.2 R2.2 R3.2 R12.2 R13.2 U1.2 U2.5 U2.6 U2.7 U7.7 U7.20 U7.21
VCC_F: C4.2 FB1.1 J1.1 R6.2 R7.2 R8.2 R9.2
pads on no net: FB1.2 FB2.1 FB2.2 J1.3 J?.1 J?.2 J?.3 J?.4 K1.12 K1.22 K2.11 K2.12 K2.14 K3.12 K3.22 U1.6 U1.7 U1.9 U1.10 U1.11 U1.17 U1.18 U1.19 U1.20 U1.21 U1.22 U1.29 U1.30 U1.31 U1.32 U1.33 U1.36 U1.37 U2.1 U2.10 U2.11 U2.12 U2.13 U2.14 U2.15 U2.16 U2.17 U2.18 U2.22 U2.24 U4.3 U6.3 U7.5 U7.6 U7.9 U7.10 U7.11 U7.12 U7.13 U7.14 U7.15 U7.16 U7.23 U7.24 U7.25 U7.26 U7.27 U7.28

## Text inside footprints (layer, text, board x,y; h text height)
J1: Top Overlay "10" at 140.235,125.735 h1.02 r90; Top Overlay "9" at 147.235,125.735 h1.02 r90; Top Overlay "2" at 140.235,113.115 h1.02 r90; Top Overlay "1" at 147.235,113.415 h1.02 r90
J10: Top Overlay "1" at 207.085,65.53 h1.02 r180; Top Overlay "6" at 199.185,62.93 h1.02 r180; Top Overlay "2" at 207.385,62.99 h1.02 r180; Top Overlay "5" at 199.185,65.47 h1.02 r180
U1: Top Assembly "ANTENNA" at 112.6,131.066 h1.88